# Altium PCB EMG_MainBoard_Layout.PcbDoc (part 5 of 7)
Units mm, origin at the board's own origin, x right, y up, seen from the top; angles counter-clockwise.
Board outline 59.1 x 36 mm, 6 copper layers (L1 TOP, L2 GND, L3 SIGNAL, L4 GND, L5 POWER SIGNAL, L6 BOTTOM), stack 1.146 mm thick; 231 components, 136 nets, 812 pads, 470 vias.
Unrouted connection lines stored in the file: 570.
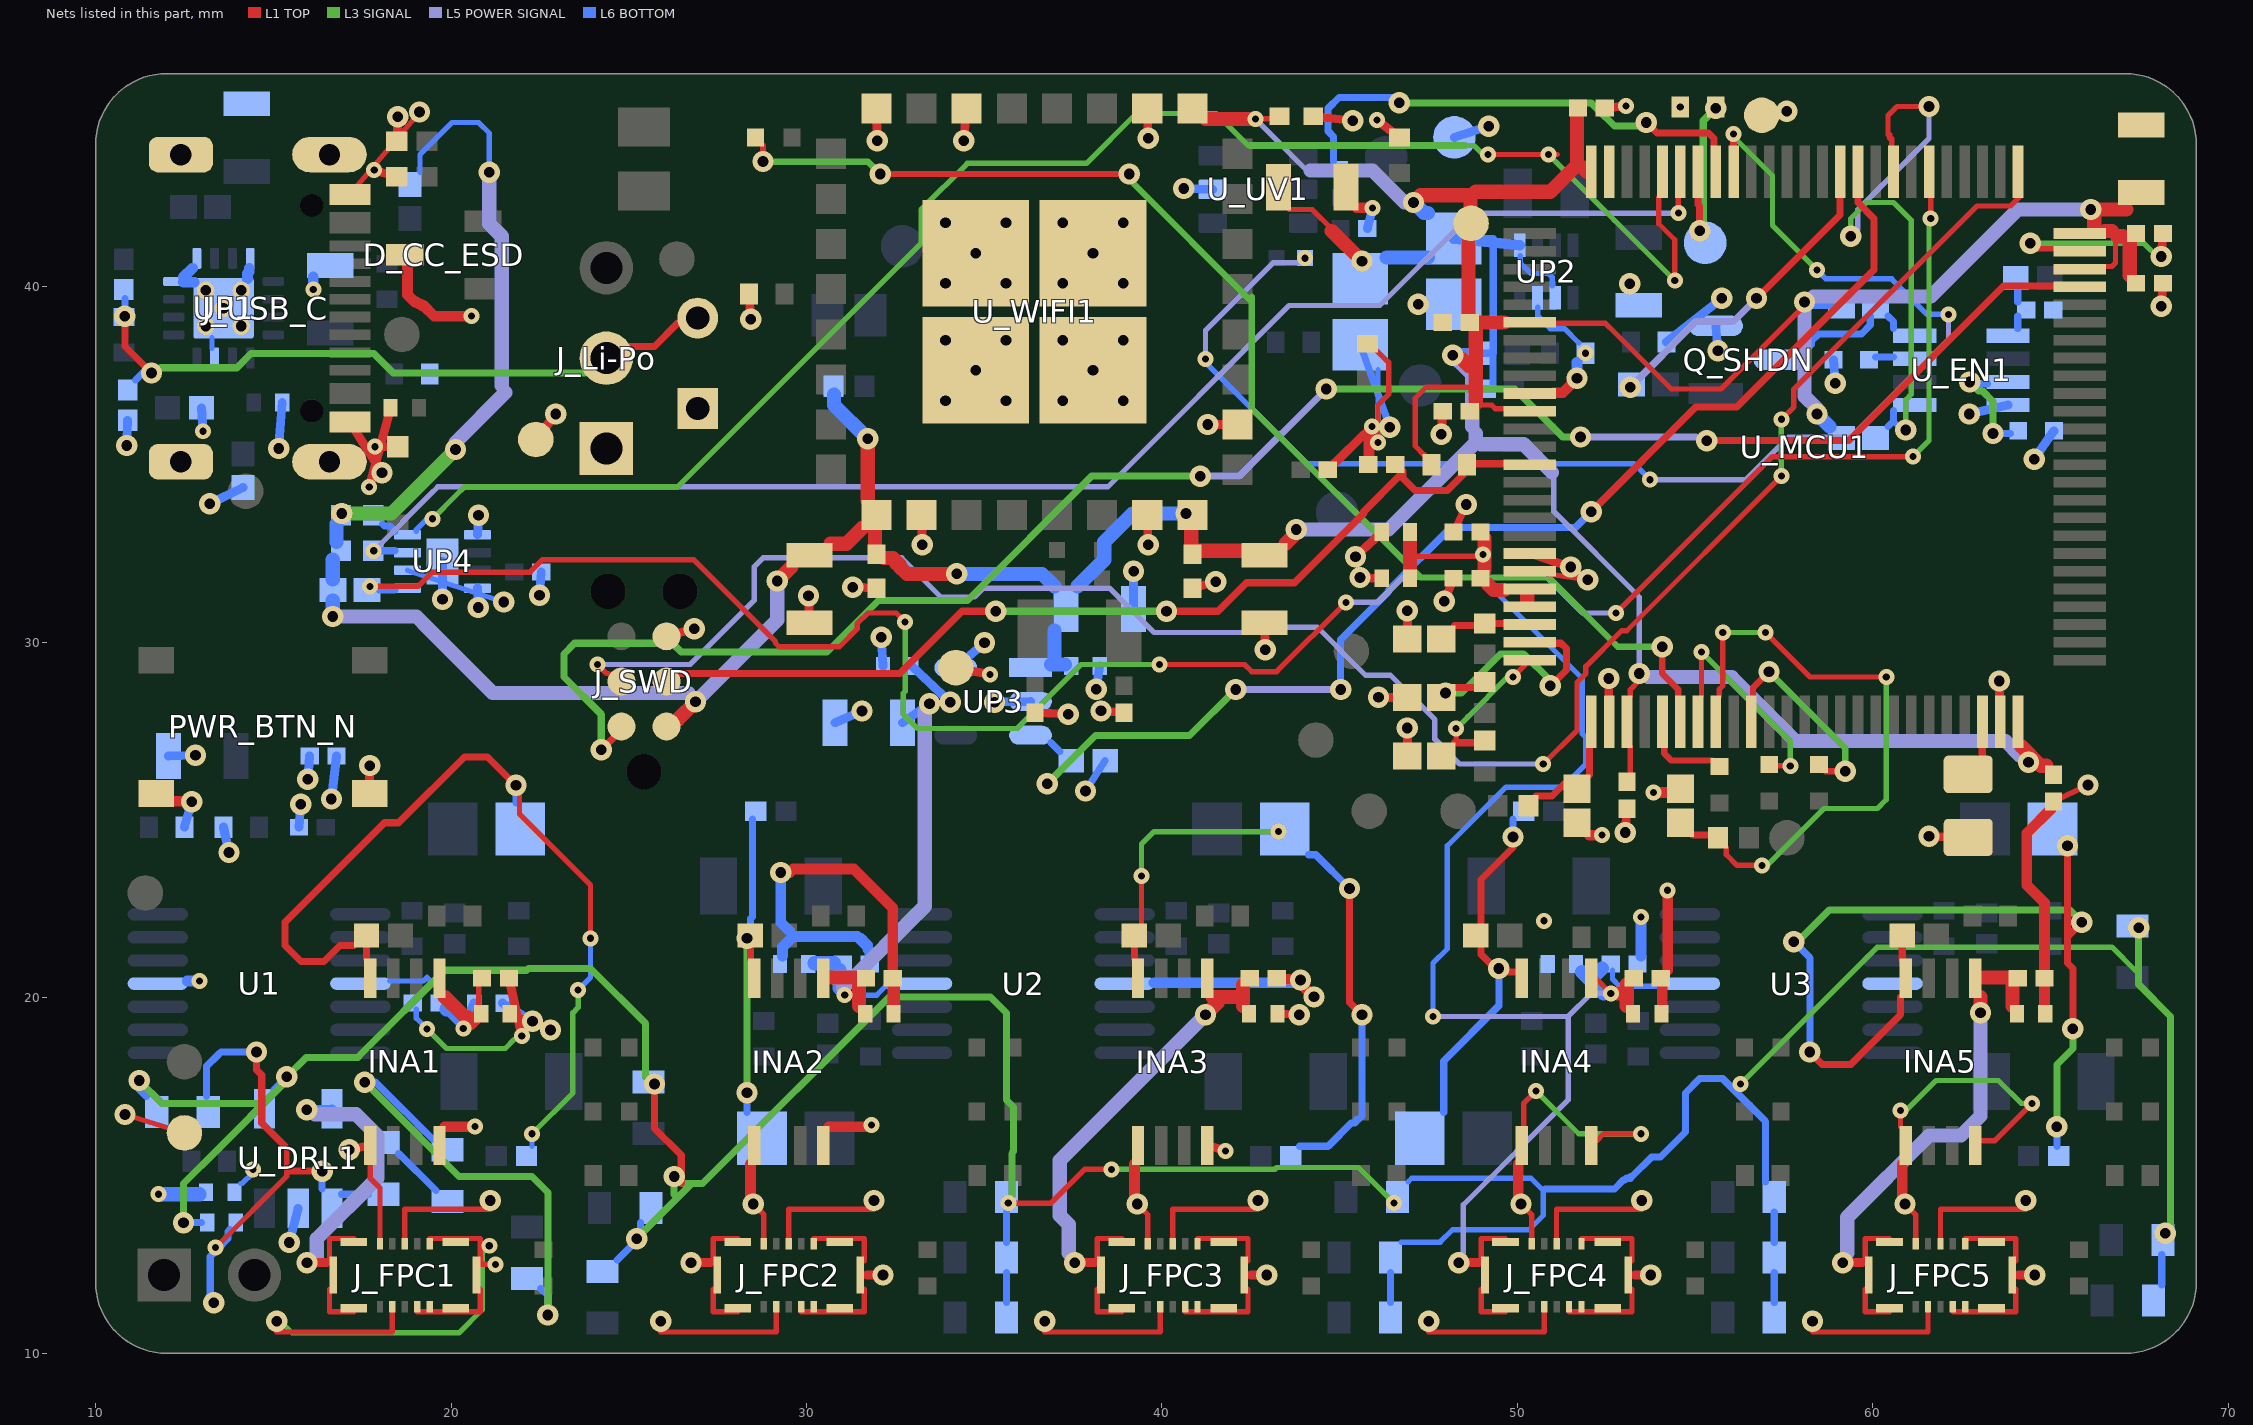
[diagram p7: the nets of this part, all layers, seen from the top]

## Part data (continued)
RDD11: library part EMG_R5_RDD11, "-55℃~+155℃ 50V 5kΩ 63mW Thin Film Resistor ±0.1% ±25ppm/℃ 0402 Chip Resistor - Surface Mount ROH", LCSC Part=C5948099, Manufacturer="Viking Tech", Package=AR0402, Power Rating=0.0625W, Resistance=5KΩ, Temperature="-55°C to +155°C", Temperature Range High=+155°C, Temperature Range Low=-55°C, Tolerance=±0.1%, Voltage Rating=50V, Automotive=No, Automotive Grade="Grade 0", Category="Resistors/Chip Resistor - Surface Mount", ComponentLink2Description=Datasheet, ComponentLink2URL=https://www.viking.com.tw/Templates/att/Thin%20Film%20Resistor%20short%20form.pdf, Composition="Thin Film", Controlled Revision="R5 2026-09-16; project-local frozen symbol/footprint", Device Class L1="Passive Components", Device Class L2=Resistors, Device Class L3="Chip SMD Resistors", Footprint Url=https://www.viking.com.tw/Templates/att/Thin%20Film%20Resistor%20short%20form.pdf, Height=0.35mm, Ipc Land Pattern Name=RESC10050X32, Lead Free=Yes, Manufacturer Part Number=AR02BTC5001, Octopart=https://octopart.com/datasheet/viking-tech/AR02BTC5001, RoHS=TRUE, Series=AR
RDD12: library part EMG_R5_RDD12, Package=None, Availability=Unavailable, Controlled Revision="R5 2026-09-16; project-local frozen symbol/footprint", MP=ERA2ARB103X, Price=None
RDD13: library part EMG_R5_RDD13, Package=None, Availability=Unavailable, Controlled Revision="R5 2026-09-16; project-local frozen symbol/footprint", MP=ERA2ARB103X, Price=None
RDD14: library part EMG_R5_RDD14, "-55℃~+155℃ 50V 5kΩ 63mW Thin Film Resistor ±0.1% ±25ppm/℃ 0402 Chip Resistor - Surface Mount ROH", LCSC Part=C5948099, Manufacturer="Viking Tech", Package=AR0402, Power Rating=0.0625W, Resistance=5KΩ, Temperature="-55°C to +155°C", Temperature Range High=+155°C, Temperature Range Low=-55°C, Tolerance=±0.1%, Voltage Rating=50V, Automotive=No, Automotive Grade="Grade 0", Category="Resistors/Chip Resistor - Surface Mount", ComponentLink2Description=Datasheet, ComponentLink2URL=https://www.viking.com.tw/Templates/att/Thin%20Film%20Resistor%20short%20form.pdf, Composition="Thin Film", Controlled Revision="R5 2026-09-16; project-local frozen symbol/footprint", Device Class L1="Passive Components", Device Class L2=Resistors, Device Class L3="Chip SMD Resistors", Footprint Url=https://www.viking.com.tw/Templates/att/Thin%20Film%20Resistor%20short%20form.pdf, Height=0.35mm, Ipc Land Pattern Name=RESC10050X32, Lead Free=Yes, Manufacturer Part Number=AR02BTC5001, Octopart=https://octopart.com/datasheet/viking-tech/AR02BTC5001, RoHS=TRUE, Series=AR
RDD15: library part EMG_R5_RDD15, Package=None, Availability=Unavailable, Controlled Revision="R5 2026-09-16; project-local frozen symbol/footprint", MP=ERA2ARB103X, Price=None
RG_1: library part EMG_R5_RG_1, "RES SMD 80.6KOHM 0.1% 1/16W 0402", Manufacturer=Yageo, Package=RT0402, Power Rating=0.063W, Resistance=80.6KΩ, Temperature="-55°C to +155°C", Temperature Coefficient="25 ppm/°C", Temperature Range High=+155°C, Temperature Range Low=-55°C, Tolerance=0.001, Voltage Rating=50V, Automotive=No, Category=Res, ComponentLink2Description=Datasheet, ComponentLink2URL=http://www.yageo.com/documents/recent/PYu-RT_1-to-0.01_RoHS_L_9.pdf, Composition="Thin Film", Controlled Revision="R5 2026-09-16; project-local frozen symbol/footprint", Device Class L1="Passive Components", Device Class L2=Resistors, Device Class L3="Chip SMD Resistors", Digikey Description="RES SMD 80.6KOHM 0.1% 1/16W 0402", Footprint Url=http://www.yageo.com/exep/pages/download/literatures/PYu-R_Mount_10.pdf, Height=0.35mm, Ipc Land Pattern Name=RESC10050X30, Lead Free=Yes, Manufacturer Part Number=RT0402BRD0780K6L, Mouser Description="Thin Film Resistors 1/16W 80.6K ohm .1% 25ppm", Octopart=https://octopart.com/rt0402brd0780k6l-yageo-1468076, RoHS=TRUE, Series=RT
RG_2: library part EMG_R5_RG_2, "RES SMD 80.6KOHM 0.1% 1/16W 0402", Manufacturer=Yageo, Package=RT0402, Power Rating=0.063W, Resistance=80.6KΩ, Temperature="-55°C to +155°C", Temperature Coefficient="25 ppm/°C", Temperature Range High=+155°C, Temperature Range Low=-55°C, Tolerance=0.001, Voltage Rating=50V, Automotive=No, Category=Res, ComponentLink2Description=Datasheet, ComponentLink2URL=http://www.yageo.com/documents/recent/PYu-RT_1-to-0.01_RoHS_L_9.pdf, Composition="Thin Film", Controlled Revision="R5 2026-09-16; project-local frozen symbol/footprint", Device Class L1="Passive Components", Device Class L2=Resistors, Device Class L3="Chip SMD Resistors", Digikey Description="RES SMD 80.6KOHM 0.1% 1/16W 0402", Footprint Url=http://www.yageo.com/exep/pages/download/literatures/PYu-R_Mount_10.pdf, Height=0.35mm, Ipc Land Pattern Name=RESC10050X30, Lead Free=Yes, Manufacturer Part Number=RT0402BRD0780K6L, Mouser Description="Thin Film Resistors 1/16W 80.6K ohm .1% 25ppm", Octopart=https://octopart.com/rt0402brd0780k6l-yageo-1468076, RoHS=TRUE, Series=RT
RG_3: library part EMG_R5_RG_3, "RES SMD 80.6KOHM 0.1% 1/16W 0402", Manufacturer=Yageo, Package=RT0402, Power Rating=0.063W, Resistance=80.6KΩ, Temperature="-55°C to +155°C", Temperature Coefficient="25 ppm/°C", Temperature Range High=+155°C, Temperature Range Low=-55°C, Tolerance=0.001, Voltage Rating=50V, Automotive=No, Category=Res, ComponentLink2Description=Datasheet, ComponentLink2URL=http://www.yageo.com/documents/recent/PYu-RT_1-to-0.01_RoHS_L_9.pdf, Composition="Thin Film", Controlled Revision="R5 2026-09-16; project-local frozen symbol/footprint", Device Class L1="Passive Components", Device Class L2=Resistors, Device Class L3="Chip SMD Resistors", Digikey Description="RES SMD 80.6KOHM 0.1% 1/16W 0402", Footprint Url=http://www.yageo.com/exep/pages/download/literatures/PYu-R_Mount_10.pdf, Height=0.35mm, Ipc Land Pattern Name=RESC10050X30, Lead Free=Yes, Manufacturer Part Number=RT0402BRD0780K6L, Mouser Description="Thin Film Resistors 1/16W 80.6K ohm .1% 25ppm", Octopart=https://octopart.com/rt0402brd0780k6l-yageo-1468076, RoHS=TRUE, Series=RT
RG_4: library part EMG_R5_RG_4, "RES SMD 80.6KOHM 0.1% 1/16W 0402", Manufacturer=Yageo, Package=RT0402, Power Rating=0.063W, Resistance=80.6KΩ, Temperature="-55°C to +155°C", Temperature Coefficient="25 ppm/°C", Temperature Range High=+155°C, Temperature Range Low=-55°C, Tolerance=0.001, Voltage Rating=50V, Automotive=No, Category=Res, ComponentLink2Description=Datasheet, ComponentLink2URL=http://www.yageo.com/documents/recent/PYu-RT_1-to-0.01_RoHS_L_9.pdf, Composition="Thin Film", Controlled Revision="R5 2026-09-16; project-local frozen symbol/footprint", Device Class L1="Passive Components", Device Class L2=Resistors, Device Class L3="Chip SMD Resistors", Digikey Description="RES SMD 80.6KOHM 0.1% 1/16W 0402", Footprint Url=http://www.yageo.com/exep/pages/download/literatures/PYu-R_Mount_10.pdf, Height=0.35mm, Ipc Land Pattern Name=RESC10050X30, Lead Free=Yes, Manufacturer Part Number=RT0402BRD0780K6L, Mouser Description="Thin Film Resistors 1/16W 80.6K ohm .1% 25ppm", Octopart=https://octopart.com/rt0402brd0780k6l-yageo-1468076, RoHS=TRUE, Series=RT
RG_5: library part EMG_R5_RG_5, "RES SMD 80.6KOHM 0.1% 1/16W 0402", Manufacturer=Yageo, Package=RT0402, Power Rating=0.063W, Resistance=80.6KΩ, Temperature="-55°C to +155°C", Temperature Coefficient="25 ppm/°C", Temperature Range High=+155°C, Temperature Range Low=-55°C, Tolerance=0.001, Voltage Rating=50V, Automotive=No, Category=Res, ComponentLink2Description=Datasheet, ComponentLink2URL=http://www.yageo.com/documents/recent/PYu-RT_1-to-0.01_RoHS_L_9.pdf, Composition="Thin Film", Controlled Revision="R5 2026-09-16; project-local frozen symbol/footprint", Device Class L1="Passive Components", Device Class L2=Resistors, Device Class L3="Chip SMD Resistors", Digikey Description="RES SMD 80.6KOHM 0.1% 1/16W 0402", Footprint Url=http://www.yageo.com/exep/pages/download/literatures/PYu-R_Mount_10.pdf, Height=0.35mm, Ipc Land Pattern Name=RESC10050X30, Lead Free=Yes, Manufacturer Part Number=RT0402BRD0780K6L, Mouser Description="Thin Film Resistors 1/16W 80.6K ohm .1% 25ppm", Octopart=https://octopart.com/rt0402brd0780k6l-yageo-1468076, RoHS=TRUE, Series=RT
RGN_1: library part EMG_R5_RGN_1, "RES 10.0K OHM 1/16W .1% SMD 0402", Manufacturer=Yageo, Package=RT0402, Power Rating=0.063W, Resistance=10KΩ, Temperature="-55°C to +155°C", Temperature Coefficient="25 ppm/°C", Temperature Range High=+155°C, Temperature Range Low=-55°C, Tolerance=0.001, Voltage Rating=50V, Automotive=No, Category=Res, ComponentLink2Description=Datasheet, ComponentLink2URL=http://www.yageo.com/documents/recent/PYu-RT_1-to-0.01_RoHS_L_9.pdf, Composition="Thin Film", Controlled Revision="R5 2026-09-16; project-local frozen symbol/footprint", Device Class L1="Passive Components", Device Class L2=Resistors, Device Class L3="Chip SMD Resistors", Digikey Description="RES 10.0K OHM 1/16W .1% SMD 0402", Footprint Url=http://www.yageo.com/exep/pages/download/literatures/PYu-R_Mount_10.pdf, Height=0.35mm, Ipc Land Pattern Name=RESC10050X30, Lead Free=Yes, Manufacturer Part Number=RT0402BRD0710KL, Mouser Description="Thin Film Resistors - SMD 10K ohm 0.1% 1/16W", Octopart=https://octopart.com/rt0402brd0710kl-yageo-1181432, RoHS=TRUE, Series=RT
RGN_2: library part EMG_R5_RGN_2, "RES 10.0K OHM 1/16W .1% SMD 0402", Manufacturer=Yageo, Package=RT0402, Power Rating=0.063W, Resistance=10KΩ, Temperature="-55°C to +155°C", Temperature Coefficient="25 ppm/°C", Temperature Range High=+155°C, Temperature Range Low=-55°C, Tolerance=0.001, Voltage Rating=50V, Automotive=No, Category=Res, ComponentLink2Description=Datasheet, ComponentLink2URL=http://www.yageo.com/documents/recent/PYu-RT_1-to-0.01_RoHS_L_9.pdf, Composition="Thin Film", Controlled Revision="R5 2026-09-16; project-local frozen symbol/footprint", Device Class L1="Passive Components", Device Class L2=Resistors, Device Class L3="Chip SMD Resistors", Digikey Description="RES 10.0K OHM 1/16W .1% SMD 0402", Footprint Url=http://www.yageo.com/exep/pages/download/literatures/PYu-R_Mount_10.pdf, Height=0.35mm, Ipc Land Pattern Name=RESC10050X30, Lead Free=Yes, Manufacturer Part Number=RT0402BRD0710KL, Mouser Description="Thin Film Resistors - SMD 10K ohm 0.1% 1/16W", Octopart=https://octopart.com/rt0402brd0710kl-yageo-1181432, RoHS=TRUE, Series=RT
RGN_3: library part EMG_R5_RGN_3, "RES 10.0K OHM 1/16W .1% SMD 0402", Manufacturer=Yageo, Package=RT0402, Power Rating=0.063W, Resistance=10KΩ, Temperature="-55°C to +155°C", Temperature Coefficient="25 ppm/°C", Temperature Range High=+155°C, Temperature Range Low=-55°C, Tolerance=0.001, Voltage Rating=50V, Automotive=No, Category=Res, ComponentLink2Description=Datasheet, ComponentLink2URL=http://www.yageo.com/documents/recent/PYu-RT_1-to-0.01_RoHS_L_9.pdf, Composition="Thin Film", Controlled Revision="R5 2026-09-16; project-local frozen symbol/footprint", Device Class L1="Passive Components", Device Class L2=Resistors, Device Class L3="Chip SMD Resistors", Digikey Description="RES 10.0K OHM 1/16W .1% SMD 0402", Footprint Url=http://www.yageo.com/exep/pages/download/literatures/PYu-R_Mount_10.pdf, Height=0.35mm, Ipc Land Pattern Name=RESC10050X30, Lead Free=Yes, Manufacturer Part Number=RT0402BRD0710KL, Mouser Description="Thin Film Resistors - SMD 10K ohm 0.1% 1/16W", Octopart=https://octopart.com/rt0402brd0710kl-yageo-1181432, RoHS=TRUE, Series=RT
RGN_4: library part EMG_R5_RGN_4, "RES 10.0K OHM 1/16W .1% SMD 0402", Manufacturer=Yageo, Package=RT0402, Power Rating=0.063W, Resistance=10KΩ, Temperature="-55°C to +155°C", Temperature Coefficient="25 ppm/°C", Temperature Range High=+155°C, Temperature Range Low=-55°C, Tolerance=0.001, Voltage Rating=50V, Automotive=No, Category=Res, ComponentLink2Description=Datasheet, ComponentLink2URL=http://www.yageo.com/documents/recent/PYu-RT_1-to-0.01_RoHS_L_9.pdf, Composition="Thin Film", Controlled Revision="R5 2026-09-16; project-local frozen symbol/footprint", Device Class L1="Passive Components", Device Class L2=Resistors, Device Class L3="Chip SMD Resistors", Digikey Description="RES 10.0K OHM 1/16W .1% SMD 0402", Footprint Url=http://www.yageo.com/exep/pages/download/literatures/PYu-R_Mount_10.pdf, Height=0.35mm, Ipc Land Pattern Name=RESC10050X30, Lead Free=Yes, Manufacturer Part Number=RT0402BRD0710KL, Mouser Description="Thin Film Resistors - SMD 10K ohm 0.1% 1/16W", Octopart=https://octopart.com/rt0402brd0710kl-yageo-1181432, RoHS=TRUE, Series=RT
RGN_5: library part EMG_R5_RGN_5, "RES 10.0K OHM 1/16W .1% SMD 0402", Manufacturer=Yageo, Package=RT0402, Power Rating=0.063W, Resistance=10KΩ, Temperature="-55°C to +155°C", Temperature Coefficient="25 ppm/°C", Temperature Range High=+155°C, Temperature Range Low=-55°C, Tolerance=0.001, Voltage Rating=50V, Automotive=No, Category=Res, ComponentLink2Description=Datasheet, ComponentLink2URL=http://www.yageo.com/documents/recent/PYu-RT_1-to-0.01_RoHS_L_9.pdf, Composition="Thin Film", Controlled Revision="R5 2026-09-16; project-local frozen symbol/footprint", Device Class L1="Passive Components", Device Class L2=Resistors, Device Class L3="Chip SMD Resistors", Digikey Description="RES 10.0K OHM 1/16W .1% SMD 0402", Footprint Url=http://www.yageo.com/exep/pages/download/literatures/PYu-R_Mount_10.pdf, Height=0.35mm, Ipc Land Pattern Name=RESC10050X30, Lead Free=Yes, Manufacturer Part Number=RT0402BRD0710KL, Mouser Description="Thin Film Resistors - SMD 10K ohm 0.1% 1/16W", Octopart=https://octopart.com/rt0402brd0710kl-yageo-1181432, RoHS=TRUE, Series=RT
RH_1: library part EMG_R5_RH_1, "RES 26.1kΩ ±0.1% 0.063W 0402", Case Code (Imperial)=0402, Case Code (Metric)=1005, JLCPCB Part=C2075472, Manufacturer=PANASONIC, Max Operating Temperature=155°C, Max Power Dissipation=63mW, Min Operating Temperature=-55°C, Power Rating=62.5mW, Resistance=26.1kR, Resistor Type="Thin Film", Temperature Coefficient=25ppm/°C, Tolerance=0.1%, Voltage Rating=50V, Case/Package=0402, Controlled Revision="R5 2026-09-16; project-local frozen symbol/footprint", Features="Moisture Resistant", Height=0.015inch, Length=0.039inch, Number of Terminations=2, Packaging="Tape and Reel", RoHS Compliant=Yes, Series=ERA-2A, Termination=SMD/SMT, Width=0.5mm
RH_2: library part EMG_R5_RH_2, "RES 26.1kΩ ±0.1% 0.063W 0402", Case Code (Imperial)=0402, Case Code (Metric)=1005, JLCPCB Part=C2075472, Manufacturer=PANASONIC, Max Operating Temperature=155°C, Max Power Dissipation=63mW, Min Operating Temperature=-55°C, Power Rating=62.5mW, Resistance=26.1kR, Resistor Type="Thin Film", Temperature Coefficient=25ppm/°C, Tolerance=0.1%, Voltage Rating=50V, Case/Package=0402, Controlled Revision="R5 2026-09-16; project-local frozen symbol/footprint", Features="Moisture Resistant", Height=0.015inch, Length=0.039inch, Number of Terminations=2, Packaging="Tape and Reel", RoHS Compliant=Yes, Series=ERA-2A, Termination=SMD/SMT, Width=0.5mm
RH_3: library part EMG_R5_RH_3, "RES 26.1kΩ ±0.1% 0.063W 0402", Case Code (Imperial)=0402, Case Code (Metric)=1005, JLCPCB Part=C2075472, Manufacturer=PANASONIC, Max Operating Temperature=155°C, Max Power Dissipation=63mW, Min Operating Temperature=-55°C, Power Rating=62.5mW, Resistance=26.1kR, Resistor Type="Thin Film", Temperature Coefficient=25ppm/°C, Tolerance=0.1%, Voltage Rating=50V, Case/Package=0402, Controlled Revision="R5 2026-09-16; project-local frozen symbol/footprint", Features="Moisture Resistant", Height=0.015inch, Length=0.039inch, Number of Terminations=2, Packaging="Tape and Reel", RoHS Compliant=Yes, Series=ERA-2A, Termination=SMD/SMT, Width=0.5mm
RH_4: library part EMG_R5_RH_4, "RES 26.1kΩ ±0.1% 0.063W 0402", Case Code (Imperial)=0402, Case Code (Metric)=1005, JLCPCB Part=C2075472, Manufacturer=PANASONIC, Max Operating Temperature=155°C, Max Power Dissipation=63mW, Min Operating Temperature=-55°C, Power Rating=62.5mW, Resistance=26.1kR, Resistor Type="Thin Film", Temperature Coefficient=25ppm/°C, Tolerance=0.1%, Voltage Rating=50V, Case/Package=0402, Controlled Revision="R5 2026-09-16; project-local frozen symbol/footprint", Features="Moisture Resistant", Height=0.015inch, Length=0.039inch, Number of Terminations=2, Packaging="Tape and Reel", RoHS Compliant=Yes, Series=ERA-2A, Termination=SMD/SMT, Width=0.5mm
RH_5: library part EMG_R5_RH_5, "RES 26.1kΩ ±0.1% 0.063W 0402", Case Code (Imperial)=0402, Case Code (Metric)=1005, JLCPCB Part=C2075472, Manufacturer=PANASONIC, Max Operating Temperature=155°C, Max Power Dissipation=63mW, Min Operating Temperature=-55°C, Power Rating=62.5mW, Resistance=26.1kR, Resistor Type="Thin Film", Temperature Coefficient=25ppm/°C, Tolerance=0.1%, Voltage Rating=50V, Case/Package=0402, Controlled Revision="R5 2026-09-16; project-local frozen symbol/footprint", Features="Moisture Resistant", Height=0.015inch, Length=0.039inch, Number of Terminations=2, Packaging="Tape and Reel", RoHS Compliant=Yes, Series=ERA-2A, Termination=SMD/SMT, Width=0.5mm
RISET: library part EMG_R5_RISET, Manufacturer=Yageo, Controlled Revision="R5 2026-09-16; project-local frozen symbol/footprint", Part Number=RC0402FR-072K94L
RJ1: library part EMG_R5_RJ1, Manufacturer="Yageo / Phycomp", Controlled Revision="R5 2026-09-16; project-local frozen symbol/footprint", Part Number=RC0402FR-075K1L
RJ2: library part EMG_R5_RJ2, Manufacturer="Yageo / Phycomp", Controlled Revision="R5 2026-09-16; project-local frozen symbol/footprint", Part Number=RC0402FR-075K1L
RL_1: library part EMG_R5_RL_1, "RES SMD 1.07K OHM 0.1% 1/16W", Manufacturer=Yageo, Package=RT0402, Power Rating=0.063W, Resistance=1.07KΩ, Temperature="-55°C to +155°C", Temperature Coefficient="25 ppm/°C", Temperature Range High=+155°C, Temperature Range Low=-55°C, Tolerance=0.001, Voltage Rating=50V, Automotive=No, Category=Res, ComponentLink2Description=Datasheet, ComponentLink2URL=http://www.yageo.com/documents/recent/PYu-RT_1-to-0.01_RoHS_L_9.pdf, Composition="Thin Film", Controlled Revision="R5 2026-09-16; project-local frozen symbol/footprint", Device Class L1="Passive Components", Device Class L2=Resistors, Device Class L3="Chip SMD Resistors", Digikey Description="RES SMD 1.07K OHM 0.1% 1/16W", Footprint Url=http://www.yageo.com/exep/pages/download/literatures/PYu-R_Mount_10.pdf, Height=0.35mm, Ipc Land Pattern Name=RESC10050X30, Lead Free=Yes, Manufacturer Part Number=RT0402BRD071K07L, Mouser Description="Thin Film Resistors 1/16W 1.07K ohm .1% 25ppm", Octopart=https://octopart.com/rt0402brd071k07l-yageo-1400807, RoHS=TRUE, Series=RT
RL_2: library part EMG_R5_RL_2, "RES SMD 1.07K OHM 0.1% 1/16W", Manufacturer=Yageo, Package=RT0402, Power Rating=0.063W, Resistance=1.07KΩ, Temperature="-55°C to +155°C", Temperature Coefficient="25 ppm/°C", Temperature Range High=+155°C, Temperature Range Low=-55°C, Tolerance=0.001, Voltage Rating=50V, Automotive=No, Category=Res, ComponentLink2Description=Datasheet, ComponentLink2URL=http://www.yageo.com/documents/recent/PYu-RT_1-to-0.01_RoHS_L_9.pdf, Composition="Thin Film", Controlled Revision="R5 2026-09-16; project-local frozen symbol/footprint", Device Class L1="Passive Components", Device Class L2=Resistors, Device Class L3="Chip SMD Resistors", Digikey Description="RES SMD 1.07K OHM 0.1% 1/16W", Footprint Url=http://www.yageo.com/exep/pages/download/literatures/PYu-R_Mount_10.pdf, Height=0.35mm, Ipc Land Pattern Name=RESC10050X30, Lead Free=Yes, Manufacturer Part Number=RT0402BRD071K07L, Mouser Description="Thin Film Resistors 1/16W 1.07K ohm .1% 25ppm", Octopart=https://octopart.com/rt0402brd071k07l-yageo-1400807, RoHS=TRUE, Series=RT
RL_3: library part EMG_R5_RL_3, "RES SMD 1.07K OHM 0.1% 1/16W", Manufacturer=Yageo, Package=RT0402, Power Rating=0.063W, Resistance=1.07KΩ, Temperature="-55°C to +155°C", Temperature Coefficient="25 ppm/°C", Temperature Range High=+155°C, Temperature Range Low=-55°C, Tolerance=0.001, Voltage Rating=50V, Automotive=No, Category=Res, ComponentLink2Description=Datasheet, ComponentLink2URL=http://www.yageo.com/documents/recent/PYu-RT_1-to-0.01_RoHS_L_9.pdf, Composition="Thin Film", Controlled Revision="R5 2026-09-16; project-local frozen symbol/footprint", Device Class L1="Passive Components", Device Class L2=Resistors, Device Class L3="Chip SMD Resistors", Digikey Description="RES SMD 1.07K OHM 0.1% 1/16W", Footprint Url=http://www.yageo.com/exep/pages/download/literatures/PYu-R_Mount_10.pdf, Height=0.35mm, Ipc Land Pattern Name=RESC10050X30, Lead Free=Yes, Manufacturer Part Number=RT0402BRD071K07L, Mouser Description="Thin Film Resistors 1/16W 1.07K ohm .1% 25ppm", Octopart=https://octopart.com/rt0402brd071k07l-yageo-1400807, RoHS=TRUE, Series=RT
RL_4: library part EMG_R5_RL_4, "RES SMD 1.07K OHM 0.1% 1/16W", Manufacturer=Yageo, Package=RT0402, Power Rating=0.063W, Resistance=1.07KΩ, Temperature="-55°C to +155°C", Temperature Coefficient="25 ppm/°C", Temperature Range High=+155°C, Temperature Range Low=-55°C, Tolerance=0.001, Voltage Rating=50V, Automotive=No, Category=Res, ComponentLink2Description=Datasheet, ComponentLink2URL=http://www.yageo.com/documents/recent/PYu-RT_1-to-0.01_RoHS_L_9.pdf, Composition="Thin Film", Controlled Revision="R5 2026-09-16; project-local frozen symbol/footprint", Device Class L1="Passive Components", Device Class L2=Resistors, Device Class L3="Chip SMD Resistors", Digikey Description="RES SMD 1.07K OHM 0.1% 1/16W", Footprint Url=http://www.yageo.com/exep/pages/download/literatures/PYu-R_Mount_10.pdf, Height=0.35mm, Ipc Land Pattern Name=RESC10050X30, Lead Free=Yes, Manufacturer Part Number=RT0402BRD071K07L, Mouser Description="Thin Film Resistors 1/16W 1.07K ohm .1% 25ppm", Octopart=https://octopart.com/rt0402brd071k07l-yageo-1400807, RoHS=TRUE, Series=RT
RL_5: library part EMG_R5_RL_5, "RES SMD 1.07K OHM 0.1% 1/16W", Manufacturer=Yageo, Package=RT0402, Power Rating=0.063W, Resistance=1.07KΩ, Temperature="-55°C to +155°C", Temperature Coefficient="25 ppm/°C", Temperature Range High=+155°C, Temperature Range Low=-55°C, Tolerance=0.001, Voltage Rating=50V, Automotive=No, Category=Res, ComponentLink2Description=Datasheet, ComponentLink2URL=http://www.yageo.com/documents/recent/PYu-RT_1-to-0.01_RoHS_L_9.pdf, Composition="Thin Film", Controlled Revision="R5 2026-09-16; project-local frozen symbol/footprint", Device Class L1="Passive Components", Device Class L2=Resistors, Device Class L3="Chip SMD Resistors", Digikey Description="RES SMD 1.07K OHM 0.1% 1/16W", Footprint Url=http://www.yageo.com/exep/pages/download/literatures/PYu-R_Mount_10.pdf, Height=0.35mm, Ipc Land Pattern Name=RESC10050X30, Lead Free=Yes, Manufacturer Part Number=RT0402BRD071K07L, Mouser Description="Thin Film Resistors 1/16W 1.07K ohm .1% 25ppm", Octopart=https://octopart.com/rt0402brd071k07l-yageo-1400807, RoHS=TRUE, Series=RT
Rservo_1: library part EMG_R5_Rservo_1, Manufacturer="Yageo / Phycomp", Controlled Revision="R5 2026-09-16; project-local frozen symbol/footprint", Part Number=RC0402FR-072ML
Rservo_2: library part EMG_R5_Rservo_2, Manufacturer="Yageo / Phycomp", Controlled Revision="R5 2026-09-16; project-local frozen symbol/footprint", Part Number=RC0402FR-072ML
Rservo_3: library part EMG_R5_Rservo_3, Manufacturer="Yageo / Phycomp", Controlled Revision="R5 2026-09-16; project-local frozen symbol/footprint", Part Number=RC0402FR-072ML
Rservo_4: library part EMG_R5_Rservo_4, Manufacturer="Yageo / Phycomp", Controlled Revision="R5 2026-09-16; project-local frozen symbol/footprint", Part Number=RC0402FR-072ML
Rservo_5: library part EMG_R5_Rservo_5, Manufacturer="Yageo / Phycomp", Controlled Revision="R5 2026-09-16; project-local frozen symbol/footprint", Part Number=RC0402FR-072ML
RUP_3: library part EMG_R5_RUP_3, "RES 560kΩ ±1% 0.063W 0402", Case/Package=0402, Max Operating Temperature=155°C, Max Power Dissipation=63mW, Min Operating Temperature=-55°C, Resistance=560kR, Resistor Type="Thick Film", Temperature Coefficient=100ppm/°C, Tolerance=1%, Controlled Revision="R5 2026-09-16; project-local frozen symbol/footprint", Features="Moisture Resistant", Height=0.015inch, Length=0.039inch, Number of Terminations=2, Packaging="Tape and Reel", RoHS Compliant=Yes, Series=AC, Width=0.02inch
RUP_4: library part EMG_R5_RUP_4, "AC0402 100KΩ 0.0625W 1.00%", Manufacturer=Yageo, Package=AC0402, Power Rating=0.0625W, Resistance=100KΩ, Temperature="-55°C to +155°C", Temperature Range High=+155°C, Temperature Range Low=-55°C, Tolerance=0.01, Voltage Rating=50V, Automotive=Yes, Automotive Grade="Grade 0", Category=Res, ComponentLink2Description=Datasheet, ComponentLink2URL=http://www.yageo.com/documents/recent/PYu-AC_51_RoHS_L_6.pdf, Composition="Thick Film", Controlled Revision="R5 2026-09-16; project-local frozen symbol/footprint", Device Class L1="Passive Components", Device Class L2=Resistors, Device Class L3="Chip SMD Resistors", Footprint Url=http://www.yageo.com/exep/pages/download/literatures/PYu-R_Mount_10.pdf, Height=0.37mm, Ipc Land Pattern Name=RESC10050X32, Lead Free=Yes, Manufacturer Part Number=AC0402FR-7D100KL, Octopart=https://octopart.com/ac0402fr-7d100kl-yageo-91024821, RoHS=TRUE, Series=AC
RV1: library part EMG_R5_RV1, "AC0402 100KΩ 0.0625W 1.00%", Manufacturer=Yageo, Package=AC0402, Power Rating=0.0625W, Resistance=100KΩ, Temperature="-55°C to +155°C", Temperature Range High=+155°C, Temperature Range Low=-55°C, Tolerance=0.01, Voltage Rating=50V, Automotive=Yes, Automotive Grade="Grade 0", Category=Res, ComponentLink2Description=Datasheet, ComponentLink2URL=http://www.yageo.com/documents/recent/PYu-AC_51_RoHS_L_6.pdf, Composition="Thick Film", Controlled Revision="R5 2026-09-16; project-local frozen symbol/footprint", Device Class L1="Passive Components", Device Class L2=Resistors, Device Class L3="Chip SMD Resistors", Footprint Url=http://www.yageo.com/exep/pages/download/literatures/PYu-R_Mount_10.pdf, Height=0.37mm, Ipc Land Pattern Name=RESC10050X32, Lead Free=Yes, Manufacturer Part Number=AC0402FR-7D100KL, Octopart=https://octopart.com/ac0402fr-7d100kl-yageo-91024821, RoHS=TRUE, Series=AC
RV2: library part EMG_R5_RV2, "AC0402 100KΩ 0.0625W 1.00%", Manufacturer=Yageo, Package=AC0402, Power Rating=0.0625W, Resistance=100KΩ, Temperature="-55°C to +155°C", Temperature Range High=+155°C, Temperature Range Low=-55°C, Tolerance=0.01, Voltage Rating=50V, Automotive=Yes, Automotive Grade="Grade 0", Category=Res, ComponentLink2Description=Datasheet, ComponentLink2URL=http://www.yageo.com/documents/recent/PYu-AC_51_RoHS_L_6.pdf, Composition="Thick Film", Controlled Revision="R5 2026-09-16; project-local frozen symbol/footprint", Device Class L1="Passive Components", Device Class L2=Resistors, Device Class L3="Chip SMD Resistors", Footprint Url=http://www.yageo.com/exep/pages/download/literatures/PYu-R_Mount_10.pdf, Height=0.37mm, Ipc Land Pattern Name=RESC10050X32, Lead Free=Yes, Manufacturer Part Number=AC0402FR-7D100KL, Octopart=https://octopart.com/ac0402fr-7d100kl-yageo-91024821, RoHS=TRUE, Series=AC
TP_GND: library part EMG_R5_TP_GND
TP_MCU_BOOT0: library part EMG_R5_TP_MCU_BOOT0
TP_WIFI_BOOT: library part EMG_R5_TP_WIFI_BOOT
TP_WIFI_CHIP_EN: library part EMG_R5_TP_WIFI_CHIP_EN
TP_WIFI_UART_RX: library part EMG_R5_TP_WIFI_UART_RX
TP_WIFI_UART_TX: library part EMG_R5_TP_WIFI_UART_TX
U1: library part EMG_R5_U1, "None", Case/Package=TSSOP, Input Bias Current=100pA, Input Offset Voltage (Vos)=4.5mV, Max Operating Temperature=125°C, Max Supply Voltage=6V, Min Operating Temperature=-40°C, Min Supply Voltage=1.8V, Nominal Supply Current=45uA, Output Current=15mA, Power Supply Rejection Ratio (PSRR)=63dB, Voltage Gain=110dB, Amplifier Type="GENERAL PURPOSE", Common Mode Rejection Ratio=56dB, Controlled Revision="R5 2026-09-16; project-local frozen symbol/footprint", Gain Bandwidth Product=1MHz, Lead Free="Lead Free", Mount="Surface Mount", Number of Channels=4, Number of Circuits=4, Number of Elements=4, Number of Pins=14, Packaging="Tape and Reel", RoHS Compliant=Yes, Slew Rate=0.5V/µs, Supply Current=45uA, Technology=CMOS, Unity Gain Bandwidth Product=1MHz
U2: library part EMG_R5_U2, "None", Case/Package=TSSOP, Input Bias Current=100pA, Input Offset Voltage (Vos)=4.5mV, Max Operating Temperature=125°C, Max Supply Voltage=6V, Min Operating Temperature=-40°C, Min Supply Voltage=1.8V, Nominal Supply Current=45uA, Output Current=15mA, Power Supply Rejection Ratio (PSRR)=63dB, Voltage Gain=110dB, Amplifier Type="GENERAL PURPOSE", Common Mode Rejection Ratio=56dB, Controlled Revision="R5 2026-09-16; project-local frozen symbol/footprint", Gain Bandwidth Product=1MHz, Lead Free="Lead Free", Mount="Surface Mount", Number of Channels=4, Number of Circuits=4, Number of Elements=4, Number of Pins=14, Packaging="Tape and Reel", RoHS Compliant=Yes, Slew Rate=0.5V/µs, Supply Current=45uA, Technology=CMOS, Unity Gain Bandwidth Product=1MHz
U3: library part EMG_R5_U3, "None", Case/Package=TSSOP, Input Bias Current=100pA, Input Offset Voltage (Vos)=4.5mV, Max Operating Temperature=125°C, Max Supply Voltage=6V, Min Operating Temperature=-40°C, Min Supply Voltage=1.8V, Nominal Supply Current=45uA, Output Current=15mA, Power Supply Rejection Ratio (PSRR)=63dB, Voltage Gain=110dB, Amplifier Type="GENERAL PURPOSE", Common Mode Rejection Ratio=56dB, Controlled Revision="R5 2026-09-16; project-local frozen symbol/footprint", Gain Bandwidth Product=1MHz, Lead Free="Lead Free", Mount="Surface Mount", Number of Channels=4, Number of Circuits=4, Number of Elements=4, Number of Pins=14, Packaging="Tape and Reel", RoHS Compliant=Yes, Slew Rate=0.5V/µs, Supply Current=45uA, Technology=CMOS, Unity Gain Bandwidth Product=1MHz
U_DRL1: library part EMG_MCP6401_SOT23_5_DRL, "MCP6401 single operational amplifier, SOT-23-5; optional DRL, DNP", Manufacturer="Microchip Technology", Package="SOT-23-5 / OT", Assembly Variant="PROTO_1_REMOTE_NTC: Not Fitted", Manufacturer Part Number=MCP6401T-E/OT, Population="DNP - optional DRL"
U_EN1: library part EMG_R5_U_EN1, "Pushbutton On / Off  Controller with µP Interrupt, 8-pin SOT23 (TS8-8), -40 to 85 degC, Pb-Free, Mini Tape and Reel", Manufacturer="Linear Technology", Code_JEDEC=MO-193, ComponentLink1Description="Manufacturer URL", ComponentLink1URL=http://www.linear.com/, ComponentLink2Description=Datasheet, ComponentLink2URL=http://cds.linear.com/docs/en/datasheet/2954fb.pdf, ComponentLink3Description="Package Specification", ComponentLink3URL=http://cds.linear.com/docs/en/packaging/SOT_8_05-08-1637.pdf, Controlled Revision="R5 2026-09-16; project-local frozen symbol/footprint", DatasheetVersion="Rev. B", Mounting Technology="Surface Mount", Number of Supplies(#)=1, PackageDescription="8-Pin Plastic TSOT-23, Body 2.9 x 1.63 mm, Pitch 0.65 mm", PackageReference=TS8-8, PackageVersion="Rev. A, 08/2010", Packing="Mini Tape and Reel", PartNumber=LTC2954ITS8-1#TRMPBF, RoHS=TRUE
U_MCU1: library part EMG_R5_U_MCU1, "Integrated Circuit", Manufacturer_Name=STMicroelectronics, Mouser Part Number=511-STM32U575VIT6, Arrow Part Number=STM32U575VIT6, Arrow Price/Stock=https://www.arrow.com/en/products/stm32u575vit6/stmicroelectronics.html?utm_currency=USD&region=nac, Controlled Revision="R5 2026-09-16; project-local frozen symbol/footprint", Datasheet Link=https://www.st.com/resource/en/datasheet/stm32u575ag.pdf, Height=1.6mm, Manufacturer_Part_Number=STM32U575VIT6, Mouser Price/Stock=https://www.mouser.co.uk/ProductDetail/STMicroelectronics/STM32U575VIT6?qs=DRkmTr78QAR9I8TWG1L7Og%3D%3D
U_UV1: library part EMG_R5_U_UV1, "Low Quiescent Current, Programmable-Delay Supervisory Circuit, 1 Supply Monitored, -40 to 125 degC, 6-pin SOT-23 (DBV), Green (RoHS & no Sb/Br)", Manufacturer="Texas Instruments", Rating=Catalog, Threshold Voltage 1 (typ)(Typ)(V)=3.07, # of Supplies Monitored=1, Code_JEDEC=MO-178-AB*, ComponentLink1Description=Datasheet, ComponentLink1URL=http://www.ti.com/general/docs/lit/getliterature.tsp?genericPartNumber=TPS3808G33&fileType=pdf, Controlled Revision="R5 2026-09-16; project-local frozen symbol/footprint", DatasheetVersion=SBVS050J, Iq(Typ)(uA)=2.4, Mounting Technology="Surface Mount", Output Driver Type / Reset Output="Active-low, Open-drain", PackageDescription="6-Pin Plastic Small-Outline Package, 2.9 x 1.6 mm Body, 0.95 mm Pitch, 2.8 mm Lead Span", PackageReference=DBV0006A, PackageVersion="revK, Mar-2006", PartNumber=TPS3808G33DBVR, Reset Threshold Accuracy(%)=0.5, SubFamily="Supervisor and Reset IC", Time Delay(ms)=Programmable, VCC(Max)(V)=6.5, VCC(Min)(V)=1.7
U_WIFI1: library part EMG_R5_U_WIFI1, "Integrated Circuit", Manufacturer_Name=STMicroelectronics, Arrow Part Number=ST67W611M1A6BTR, Arrow Price/Stock=https://www.arrow.com/en/products/st67w611m1a6btr/stmicroelectronics.html?utm_currency=USD&region=nac, Controlled Revision="R5 2026-09-16; project-local frozen symbol/footprint", Datasheet Link=https://www.st.com/resource/en/datasheet/st67w611m1.pdf, Height=2.37mm, Manufacturer_Part_Number=ST67W611M1A6BTR
UP1: library part EMG_R5_UP1, "BQ24072T single-cell Li-ion charger with dynamic power path; OUT tracks battery +225mV with 3.4V minimum regulation under USB power", Manufacturer="Texas Instruments", Over Voltage Protection=N, Code_JEDEC=MO-220, ComponentLink1Description=Datasheet, ComponentLink1URL=http://www.ti.com/general/docs/lit/getliterature.tsp?genericPartNumber=BQ24072T&fileType=pdf, Controlled Revision="R5 2026-09-16; project-local frozen symbol/footprint", DatasheetVersion=SLUS937A, Eco-Plan="Green (RoHS & no Sb/Br)", Lead Acid=N, Li-Ion=Y, Li-Polymer=Y, Manufacturer Part Number=BQ24072TRGTR, Mounting Technology="Surface Mount", NiCd=N, NiMH=N, PackageDescription="16-Pin Plastic Quad Flat No-Lead, 3 x 3 mm Body, 0.5 mm Pitch, 1.7 x 1.7 mm Exposed Pad", PackageReference=RGT0016C, PackageVersion="revH, Oct-2011", PartNumber=BQ24072TRGTR, SubFamily="Battery Charge Management", Vin(Min)(V)=4.3
UP2: library part EMG_R5_UP2, "1.5-A output current, high-power-density buck-boost converter", Package="SOT-583 Texas Instruments", Check_prices=https://www.snapeda.com/parts/TPS631000DRLR/Texas+Instruments/view-part/?ref=eda, Controlled Revision="R5 2026-09-16; project-local frozen symbol/footprint", MF="Texas Instruments", MP=TPS631000DRLR, SnapEDA_Link=https://www.snapeda.com/parts/TPS631000DRLR/Texas+Instruments/view-part/?ref=snap
UP3: library part EMG_R5_UP3, "IC REG LINEAR 3V 300MA SOT23-5", Controlled Revision="R5 2026-09-16; project-local frozen symbol/footprint", RoHS Compliant=Yes
UP4: library part EMG_R5_UP4, "3ÂµA 1-Cell/2-Cell Fuel Gauge with ModelGauge", Package="TDFN-8 Maxim", Availability="In Stock", Check_prices=https://www.snapeda.com/parts/MAX17048G+T10/Analog+Devices/view-part/?ref=eda, Controlled Revision="R5 2026-09-16; project-local frozen symbol/footprint", MF="Analog Devices", MP=MAX17048G+T10, Price=None, Purchase-URL=https://pricing.snapeda.com/search/part/MAX17048G+T10/?ref=eda, SnapEDA_Link=https://www.snapeda.com/parts/MAX17048G+T10/Analog+Devices/view-part/?ref=snap
X_WIFI_32K: library part EMG_R5_X_WIFI_32K, "Epson FC-135 32.768 kHz 9 pF +/-20 ppm, ESR 70 kohm max, 3.2x1.5 mm, 2 terminals", Frequency="32.768 kHz", Load Capacitance="9 pF", Manufacturer="Seiko Epson Corporation", Package="SMD3215 / 3.2 x 1.5 mm / 2 terminal", Temperature Range="-40 to +85 degC", Tolerance="+/-20 ppm at 25 degC, 0.1 uW", Controlled Revision="R5 2026-09-16; project-local frozen symbol/footprint", Datasheet Link=https://download.epsondevice.com/td/pdf/td_xtal_32khz/FC-135_Q13FC13500003_en.pdf, Drive Level="0.1 uW nominal; 0.5 uW maximum", ESR="70 kohm maximum", Height="0.8 +/-0.1 mm", Manufacturer Part Number=Q13FC13500003, Packaging Note="Q13FC13500003xx; xx=00 is 3000/reel"

## Free pads (board coordinates)
  round 1 smd paste-0.5 mask+0.05: TP_3V0_ANA(34.199,29.288) TP_3V3_DIG(48.695,41.786) TP_GND_ANA(12.5,16.2) TP_GND_DIG(56.871,44.829) TP_GND_PWR(22.385,35.705) TP_VBAT_CELL(26.353,40.785) TP_VBUS(14.225,34.252) TP_VOUT_1(45.33,29.75) TP_VOUT_2(48.33,25.25) TP_VOUT_3(45.83,25.25) TP_VOUT_4(44.33,27.25) TP_VOUT_5(57.58,24.5) TP_VREF_A(12.5,18.2) TP_VREF_B_SRC(11.4,22.95) TP_VSYS(18.617,38.659)

## Via types
v1: diameter 0.6, hole 0.3, L1 TOP to L6 BOTTOM, 327 vias
v2: diameter 0.45, hole 0.2, L1 TOP to L6 BOTTOM, 138 vias
v3: diameter 0.5, hole 0.3, L1 TOP to L6 BOTTOM, 5 vias

## Nets (pads, with @x,y where several pads share a name; then routed paths per layer and width w, separated by ;. In a path a pad name is that pad's centre, name@x,y a point inside that pad or via, vN(x,y) a via of type N, cw(c..) or ccw(c..) an arc to the next point about the centre after c; other vN are vias at no path point)
3V0_ANA: C1_MCU.1 C2_MCU.2 C3_MCU.1 C4_MCU.2 C_DRL_DEC.1 CCU1.1 CCU2.2 CCU3.2 CCU4.1 CCU5.2 CCU6.1 CCU7.2 CCU8.1 CCU9.2 CCU10.1 Cdiv.2 CU_11.2 CU_12.2 CU_14.2 CU_21.1 CU_22.1 CU_24.1 CUP5_2.2 CUP5_3.2 INA1.5 INA2.5 INA3.5 INA4.5 INA5.5 J_FPC1.P1_1 J_FPC1.P1_2 J_FPC1.P1_3 J_FPC2.P1_1 J_FPC2.P1_2 J_FPC2.P1_3 J_FPC3.P1_1 J_FPC3.P1_2 J_FPC3.P1_3 J_FPC4.P1_1 J_FPC4.P1_2 J_FPC4.P1_3 J_FPC5.P1_1 J_FPC5.P1_2 J_FPC5.P1_3 pad.TP_3V0_ANA RV2.1 U1.4 U2.4 U3.4 U_DRL1.5 U_MCU1.21 U_MCU1.22 UP3.5 | length 107.1
  L1 TOP w0.15: J_FPC1.P1_2@16.58,11.8 16.58,11.17 J_FPC1.P1_3@17.265,11.17 ; J_FPC1.P1_2@16.58,12.6 16.58,13.23 J_FPC1.P1_1@17.265,13.23 ; CCU2.2@20.775,19.775 CCU1.1@20.775,20.375 ; J_FPC2.P1_2@27.38,11.8 27.38,11.17 J_FPC2.P1_3@28.065,11.17 ; J_FPC2.P1_2@27.38,12.6 27.38,13.23 J_FPC2.P1_1@28.065,13.23 ; v2(31.075,20.075) v2@31.275,20.075 ; J_FPC3.P1_2@38.18,11.8 38.18,11.17 J_FPC3.P1_3@38.865,11.17 ; J_FPC3.P1_2@38.18,12.6 38.18,13.23 J_FPC3.P1_1@38.865,13.23 ; 47.125,32.425 48.605,32.425 v2@48.875,32.425 ; J_FPC4.P1_2@48.98,11.8 48.98,11.17 J_FPC4.P1_3@49.665,11.17 ; J_FPC4.P1_2@48.98,12.6 48.98,13.23 J_FPC4.P1_1@49.665,13.23 ; INA4.5@52.225,20.525 v2(52.625,20.125) ; J_FPC5.P1_2@59.78,11.8 59.78,11.17 J_FPC5.P1_3@60.465,11.17 ; J_FPC5.P1_2@59.78,12.6 59.78,13.23 J_FPC5.P1_1@60.465,13.23
  L1 TOP w0.25: v1(15.95,12.55) 16.5,12.55 ; v1(26.75,12.55) 27.3,12.55 ; pad.TP_3V0_ANA@34.199,29.288 v2(35.157,29.096) ; v1(37.55,12.55) 38.1,12.55 ; v1(48.35,12.55) 48.9,12.55 ; v1(59.15,12.55) 59.7,12.55
  L1 TOP w0.4: INA1.5@19.825,20.025 20.375,19.475 20.425,19.475 ; 20.525,19.275 CCU2.2@20.675,19.425 ; INA2.5@30.625,20.575 CCU4.1@31.425,20.575 ; CCU3.2@31.475,19.775 CCU4.1@31.475,20.375 ; v1(41.225,19.525) 41.575,19.875 ; INA3.5@41.425,20.025 42.075,20.025 ; CCU5.2@42.275,19.775 CCU6.1@42.275,20.375 ; C4_MCU.2@46.975,32.025 C2_MCU.2@46.975,32.875 ; C3_MCU.1@49.075,32.025 C1_MCU.1@49.075,32.925 ; C3_MCU.1@49.175,31.625 49.325,31.475 U_MCU1.21@49.625,31.475 ; U_MCU1.22@50.275,31.125 U_MCU1.21@50.275,31.375 ; v2@52.825,20.125 52.875,20.125 ; CCU7.2@53.075,19.775 CCU8.1@53.075,20.375 ; v1(63.025,19.575) INA5.5@63.025,20.025 ; INA5.5@63.025,20.575 CCU10.1@63.825,20.575 ; CCU9.2@63.925,19.775 CCU10.1@63.925,20.375
  L5 POWER SIGNAL w0.15: v2(47.625,19.475) 51.375,19.475 ; 48.475,12.825 48.475,14.175 51.425,17.125 51.425,19.475 52.075,20.125 v2(52.625,20.125)
  L5 POWER SIGNAL w0.4: v1@16.175,16.725 17.325,16.725 17.925,16.125 17.925,14.925 16.225,13.225 v1@16.225,12.625 ; v2@31.025,20.275 33.325,22.575 v1@33.325,28.025 ; 37.375,12.825 37.375,13.625 37.125,13.875 37.125,15.425 v1(41.225,19.525) ; 59.275,12.825 59.275,13.825 61.575,16.125 62.475,16.125 63.025,16.675 v1(63.025,19.575)
  L6 BOTTOM w0.15: U1.4@18.275,20.475 19.225,20.475 19.325,20.575 19.625,20.275 CU_11.2@19.625,20.075 ; v2(31.075,20.075) 31.975,20.075 32.225,20.325 U2.4@32.425,20.325 ; v2(47.625,19.475) 47.625,20.975 48.025,21.375 48.025,24.275 49.675,25.925 51.275,25.925 51.374,26.024 51.925,26.575 51.925,27.325 51.825,27.425 51.825,28.975 49.025,31.775 v2(49.025,32.475) ; CU_14.2@52.675,20.775 52.675,20.525 52.875,20.325 U3.4@54.025,20.325
  L6 BOTTOM w0.25: RV2.1@13.6,24.8 v1(13.752,24.088) ; v1(15.938,16.855) U_DRL1.5@16.65,16.88 ; v1(16.635,25.592) Cdiv.2@16.779,26.8 ; v2(20.344,19.136) CU_21.1@20.65,19.85 ; CUP5_3.2@32.7,27.738 v1(33.46,28.27) ; CUP5_2.2@32.95,29.338 v1(34.044,28.316) ; UP3.5@34.2,29.288 v1(35.006,29.989)
  L6 BOTTOM w0.4: v2(11.775,14.475) 11.906,14.475 C_DRL_DEC.1@12.925,14.475 ; CU_11.2@19.875,19.675 19.975,19.675 20.275,19.375 ; CU_22.1@30.225,20.975 CU_12.2@30.775,20.975 ; 30.925,20.275 CU_12.2@30.925,20.775 ; CU_24.1@51.825,20.725 v2@52.425,20.125 ; 52.175,20.625 CU_14.2@52.375,20.825
3V3_DIG: C_MCU_BULK.1 C_MCU_VDD1.2 C_MCU_VDD2.2 C_MCU_VDD3.2 C_MCU_VDD4.1 C_MCU_VDD5.1 C_VBAT.2 C_VDDUSB.1 C_WIFI_BULK.2 C_WIFI_VDD33.1 C_WIFI_VDD33_HF.1 C_WIFI_VDDIO1.2 C_WIFI_VDDIO1_HF.1 C_WIFI_VDDIO2.2 C_WIFI_VDDIO2_HF.2 CUP4.1 CUP4_FB.2 CUP5_1.1 CUP5_5.1 J_SWD.1 pad.TP_3V3_DIG R_AL.2 R_INT_PULLUP.1 R_KILL_PU.2 R_NRST.2 R_PGOOD.2 R_SCL.2 R_SDA.2 R_WIFI_BOOT_OVR.1 RUP_3.2 U_MCU1.6 U_MCU1.11 U_MCU1.28 U_MCU1.50 U_MCU1.73 U_MCU1.75 U_MCU1.100 U_WIFI1.9 U_WIFI1.16 U_WIFI1.25 UP2.1 UP2.6 UP3.1 | length 150.8
  L1 TOP w0.15: v2(42.625,44.725) C_WIFI_VDDIO2_HF.2@43.075,44.725 ; C_WIFI_VDDIO2.2@43.575,42.175 44.225,42.175 44.775,41.625 ; R_NRST.2@47.375,35.275 47.125,35.525 47.125,36.875 47.425,37.175 48.605,37.175 48.625,37.175 ; 48.975,36.675 49.275,36.675 49.375,36.575 U_MCU1.11@49.625,36.575 ; U_MCU1.6@51.025,38.975 52.475,38.975 52.722,38.728 54.325,37.125 55.725,37.125 v1@57.925,39.325 ; C_MCU_VDD2.2@53.175,26.325 U_MCU1.28@53.175,27.075 ; U_MCU1.28@53.175,28.475 53.175,28.675 53.425,28.925 v1(53.425,29.125) ; U_MCU1.73@66.525,40.575 66.725,40.575 66.825,40.675 66.825,41.275
  L1 TOP w0.4: J_SWD.1@26.375,27.825 v1(26.875,28.325) ; v1(29.175,31.725) C_WIFI_VDDIO1.2@29.575,32.125 ; C_WIFI_VDDIO1.2@30.675,32.775 31.125,32.775 U_WIFI1.9@31.575,33.225 ; U_WIFI1.9@31.725,33.975 v1(31.725,35.725) ; C_WIFI_VDDIO1_HF.1@31.925,32.725 U_WIFI1.9@31.925,33.225 ; C_WIFI_VDDIO1_HF.1@32.175,32.375 32.425,32.375 32.525,32.275 32.525,32.225 32.575,32.225 32.575,32.175 32.625,32.175 32.625,32.125 32.825,31.925 v1(34.225,31.925) ; C_WIFI_VDD33_HF.1@40.825,32.725 U_WIFI1.16@40.825,33.225 ; C_WIFI_VDD33_HF.1@41.075,32.575 C_WIFI_VDD33.1@42.275,32.575 ; U_WIFI1.25@41.225,44.725 v2@42.475,44.725 ; C_WIFI_VDD33.1@43.475,32.775 43.775,33.075 v1(43.775,33.175) ; 44.775,41.575 v1(45.625,40.725) ; v1(47.075,42.375) 47.275,42.575 48.675,42.575 pad.TP_3V3_DIG@48.675,42.275 ; v1@48.425,37.975 48.605,37.795 48.625,37.775 ; C_VBAT.2@48.625,39.225 pad.TP_3V3_DIG@48.625,41.325 ; C_MCU_VDD1.2@48.825,36.725 48.825,38.825 48.825,39 U_MCU1.6@49.625,39 ; 48.825,42.675 50.925,42.675 51.675,43.425 C_MCU_VDD5.1@51.675,44.825 ; 51.825,43.375 U_MCU1.100@51.975,43.225 ; U_MCU1.50@64.175,27.075 64.725,26.525 C_MCU_VDD3.2@64.875,26.525 ; v1(66.125,42.175) 67.125,42.175 ; U_MCU1.75@66.225,41.625 v1@66.225,41.925 ; U_MCU1.75@66.525,41.575 66.725,41.575 ; 66.875,41.425 67.025,41.425 ; C_VDDUSB.1@67.225,40.325 C_MCU_VDD4.1@67.225,41.325
  L3 SIGNAL w0.4: v1(16.925,33.625) 17.395,33.625 18.325,33.625 18.86,34.16 v1(20.125,35.425)
  L5 POWER SIGNAL w0.15: v2(42.625,44.725) 44.125,43.225 ; 50.725,35.025 51.025,35.025 51.025,33.675 53.425,31.275 v1(53.425,29.125)
  L5 POWER SIGNAL w0.4: v1(16.675,30.725) 17.395,30.725 19.025,30.725 19.36,30.39 21.175,28.575 26.675,28.575 ; v1(20.125,35.425) 20.125,35.625 21.525,37.025 ; v1(21.075,43.225) 21.075,41.775 21.425,41.425 21.425,37.225 ; v1(26.875,28.325) 29.175,30.625 v1(29.175,31.725) ; v1(43.775,33.175) 46.375,33.175 48.605,35.405 48.825,35.625 48.825,35.875 ; 44.175,43.275 45.925,43.275 46.825,42.375 v1(47.075,42.375) ; v1(48.175,38.075) 48.605,37.646 48.725,37.525 48.725,36.075 ; 48.975,35.575 50.175,35.575 50.975,34.775 ; v1@53.675,29.025 56.025,29.025 57.825,27.225 63.725,27.225 64.125,26.825 ; v1(58.075,39.575) 58.075,36.925 58.425,36.575 v1(58.425,36.425) ; v1@58.325,39.725 61.625,39.725 64.075,42.175 v1(66.125,42.175)
  L6 BOTTOM w0.15: 19.125,43.225 19.125,43.725 20.025,44.625 20.775,44.625 21.075,44.325 21.075,43.525 ; UP2.1@50.075,40.875 50.075,40.675 50.375,40.375 50.875,40.375 50.975,40.275 UP2.6@50.975,40.025
  L6 BOTTOM w0.2: RUP_3.2@49.033,38.134 49.323,38.134 49.323,41.359 CUP4.1@48.212,41.359 49.317,41.359 49.317,37.133 CUP4_FB.2@49.122,37.133
  L6 BOTTOM w0.3: CUP4.1@48.212,41.359 UP2.1@50.062,41.169
  L6 BOTTOM w0.4: v1(16.675,30.725) R_AL.2@16.675,31.175 ; R_AL.2@16.675,31.775 R_SCL.2@16.675,32.325 ; R_SCL.2@16.775,32.825 R_SDA.2@16.775,33.325 ; R_WIFI_BOOT_OVR.1@30.775,36.975 30.775,36.675 v1(31.725,35.725) ; v1(34.225,31.925) 36.625,31.925 CUP5_5.1@36.975,31.575 ; UP3.1@36.875,29.375 CUP5_1.1@37.275,29.375 ; 36.975,29.575 CUP5_5.1@36.975,30.325 ; CUP5_5.1@37.625,31.575 38.375,32.325 38.375,32.825 39.175,33.625 v1(40.675,33.625) ; C_WIFI_BULK.2@46.325,40.825 CUP4.1@47.475,40.825 ; v1(47.075,42.375) 47.375,42.075 CUP4.1@47.475,42.075 ; v1(48.175,38.075) 48.605,38.075 48.675,38.075 ; v1(58.075,39.575) R_KILL_PU.2@58.775,39.575 ; v1(58.425,36.425) R_INT_PULLUP.1@58.775,36.075
  other v1: 64.375,26.625
ADC_EMG1: C_ADC1.1 R_ADC1.2 U_MCU1.23 | length 0.9
  L1 TOP w0.2: C_ADC1.1@48.225,30.475 48.605,30.475 48.775,30.475 ; R_ADC1.2@49.325,30.525 U_MCU1.23@49.625,30.525
ADC_EMG2: C_ADC2.1 R_ADC2.2 U_MCU1.24 | length 6.4
  L1 TOP w0.2: v1(47.975,28.575) 48.125,28.725 48.605,28.725 R_ADC2.2@48.825,28.725 ; v1(50.925,28.775) 51.375,29.225 51.375,29.825 51.225,29.975 U_MCU1.24@51.025,29.975
  L3 SIGNAL w0.2: v1(47.975,28.575) 48.425,28.575 48.605,28.754 49.525,29.675 50.175,29.675 50.925,28.925 v1(50.925,28.775)
ADC_EMG3: C_ADC3.1 R_ADC3.2 U_MCU1.25 | length 3.6
  L1 TOP w0.15: 48.275,27.275 v2(48.275,27.575) ; v2(49.875,29.025) U_MCU1.25@50.225,29.375
  L1 TOP w0.2: C_ADC3.1@48.225,27.175 48.605,27.175 R_ADC3.2@48.825,27.175
  L3 SIGNAL w0.15: v2(48.275,27.575) 48.605,27.905 49.725,29.025 v2(49.875,29.025)
ADC_EMG4: C_ADC4.1 R_ADC4.2 U_MCU1.26 | length 1.7
  L1 TOP w0.2: R_ADC4.2@50.525,25.675 50.975,25.675 C_ADC4.1@51.324,26.024 ; C_ADC4.1@52.025,26.275 U_MCU1.26@52.025,27.075
ADC_EMG5: C_ADC5.1 R_ADC5.2 U_MCU1.33 | length 16.4
  L1 TOP w0.15: U_MCU1.33@55.675,28.475 55.675,28.675 55.775,28.775 v2(55.775,30.275) ; R_ADC5.2@55.875,24.225 55.875,24.025 56.175,23.725 v2(56.875,23.725) ; v2(56.975,30.275) 58.225,29.025 v2(60.375,29.025)
  L1 TOP w0.2: C_ADC5.1@54.925,24.575 R_ADC5.2@55.375,24.575
  L3 SIGNAL w0.15: v2(55.775,30.275) v2(56.975,30.275) ; v2(56.875,23.725) 57.025,23.725 58.625,25.325 60.125,25.325 60.375,25.575 60.375,26.024 v2(60.375,29.025)
AFE_EN: R_EN_PD.1 U_MCU1.85 UP3.3 | length 33.2
  L1 TOP w0.2: v1(52.075,33.675) 55.025,36.625 56.175,36.625 60.025,40.475 60.025,41.925 59.575,42.375 U_MCU1.85@59.575,42.525
  L3 SIGNAL w0.2: v1(36.775,26.025) 38.125,27.375 40.775,27.375 v1(42.075,28.675)
  L5 POWER SIGNAL w0.2: v1(42.075,28.675) v1(45.025,28.675)
  L6 BOTTOM w0.2: v1(36.775,26.025) R_EN_PD.1@37.125,26.375 ; 36.875,27.175 R_EN_PD.1@37.125,26.925 ; v1(45.025,28.675) 45.025,30.075 46.375,31.425 46.375,31.475 48.125,33.225 48.605,33.225 51.625,33.225 v1(52.075,33.675)
BAT_TEMP: J_Li-Po.2 R_TH_BAT.2 R_TS_BOTTOM.2 R_TS_SER.1 R_TS_TOP.1 | length 16.9
  L1 TOP w0.2: v1(10.825,39.175) 10.825,38.325 10.9,38.25 v1(11.575,37.575) ; J_Li-Po.2@25.025,38.325 25.725,38.325 26.375,38.975
  L3 SIGNAL w0.2: v1@11.825,37.725 13.975,37.725 14.375,38.125 16.3,38.125 17.825,38.125 18.375,37.575 J_Li-Po.2@23.775,37.575
  L6 BOTTOM w0.2: v1(10.825,39.175) R_TS_TOP.1@10.825,39.675 ; R_TS_BOTTOM.2@11.125,37.375 11.325,37.575 v1(11.575,37.575)
DRL_AMP_OUT: C_DRL_FB.2 R_DRL_FB.2 R_DRL_OUT1.1 U_DRL1.1 | length 14.4
  L1 TOP w0.15: v2(13.375,12.975) 13.45,13.05 13.678,13.278 15.106,14.706 15.375,14.975 15.375,15.775
  L1 TOP w0.2: v1(14.525,18.475) 14.525,18.43 14.525,17.975 14.675,17.825 14.675,16.475 15.325,15.825 ; 15.425,15.125 v1(16.375,15.125)
  L3 SIGNAL w0.2: v1@13.225,11.525 v1(13.325,11.425)
  L6 BOTTOM w0.15: v2(13.375,12.975) 13.45,13.05 13.678,13.278 13.775,13.375 C_DRL_FB.2@13.775,13.475
  L6 BOTTOM w0.2: R_DRL_FB.2@13.125,17.225 13.125,18.075 13.45,18.4 13.48,18.43 13.525,18.475 v1(14.525,18.475) ; v1(13.325,11.425) 13.225,11.525 13.225,12.725 13.45,12.95 13.725,13.225 13.725,13.278 13.725,13.425 C_DRL_FB.2@13.775,13.475 ; U_DRL1.1@16.375,14.625 v1(16.375,15.125) ; U_DRL1.1@16.925,14.475 R_DRL_OUT1.1@17.675,14.475
DRL_LIMIT_MID: R_DRL_OUT1.2 R_DRL_OUT2.1 | length 1.5
  L6 BOTTOM w0.2: R_DRL_OUT1.2@18.525,15.625 R_DRL_OUT2.1@19.575,14.575
DRL_LIMITED: R_DRL_OUT2.2 R_DRL_SEL.1 | length 13.3
  L3 SIGNAL w0.2: v1(17.575,17.625) 17.95,17.25 20.225,14.975 22.275,14.975 22.725,14.525 v1(22.725,11.075)
  L6 BOTTOM w0.2: v1(17.575,17.625) 17.875,17.625 17.95,17.55 R_DRL_OUT2.2@19.475,16.025 ; R_DRL_SEL.1@22.525,11.825 22.725,11.625 v1(22.725,11.075)
DRL_SUM: C_DRL_FB.1 R_DRL_FB.1 R_DRL_VA1.2 R_DRL_VA2.2 R_DRL_VA3.2 R_DRL_VA4.2 R_DRL_VA5.2 R_DRL_VB1.2 R_DRL_VB2.2 R_DRL_VB3.2 R_DRL_VB4.2 R_DRL_VB5.2 R_DRL_VC1.2 R_DRL_VC2.2 R_DRL_VC3.2 R_DRL_VC4.2 R_DRL_VC5.2 U_DRL1.4 | length 105.7
  L1 TOP w0.15: v2(35.675,14.225) 36.875,14.225 37.825,15.175 v2(38.575,15.175)
  L1 TOP w0.2: v1(25.725,17.575) 25.725,16.325 26.475,15.575 v1@26.475,14.775 ; v1(26.275,14.975) v1@26.375,14.975
  L3 SIGNAL w0.15: v2(38.575,15.175) 43.175,15.175 43.225,15.225 45.525,15.225 v2(46.525,14.225) ; v2(56.275,17.575) 60.125,21.425 66.725,21.425 67.375,20.775
  L3 SIGNAL w0.2: v1(11.225,17.675) 11.875,17.025 13.45,17.025 14.525,17.025 ; v1(12.475,13.675) 12.475,14.775 13.45,15.75 13.478,15.778 v1@15.225,17.525 ; v1(15.375,17.775) 15.925,18.325 17.375,18.325 17.48,18.43 19.825,20.775 22.125,20.775 22.175,20.825 23.925,20.825 25.475,19.275 25.475,17.775 ; v1(25.225,13.225) 26.725,14.725 ; 26.275,14.475 v1(26.275,14.975) ; 26.525,14.775 27.075,14.775 32.325,20.025 35.175,20.025 35.625,19.575 35.625,17.125 35.825,16.925 35.825,15.675 35.775,15.625 v2@35.775,14.425 ; v1(67.475,21.975) 67.475,20.375 68.375,19.475 68.375,13.525 v1(68.225,13.375)